# Altium PCB PCB1.PcbDoc
Units mm, origin at the board's own origin, x right, y up, seen from the top; angles counter-clockwise.
Board outline 60 x 22.5 mm, 2 copper layers (Top Layer, Bottom Layer); 17 components, 12 nets, 51 pads, 0 vias.
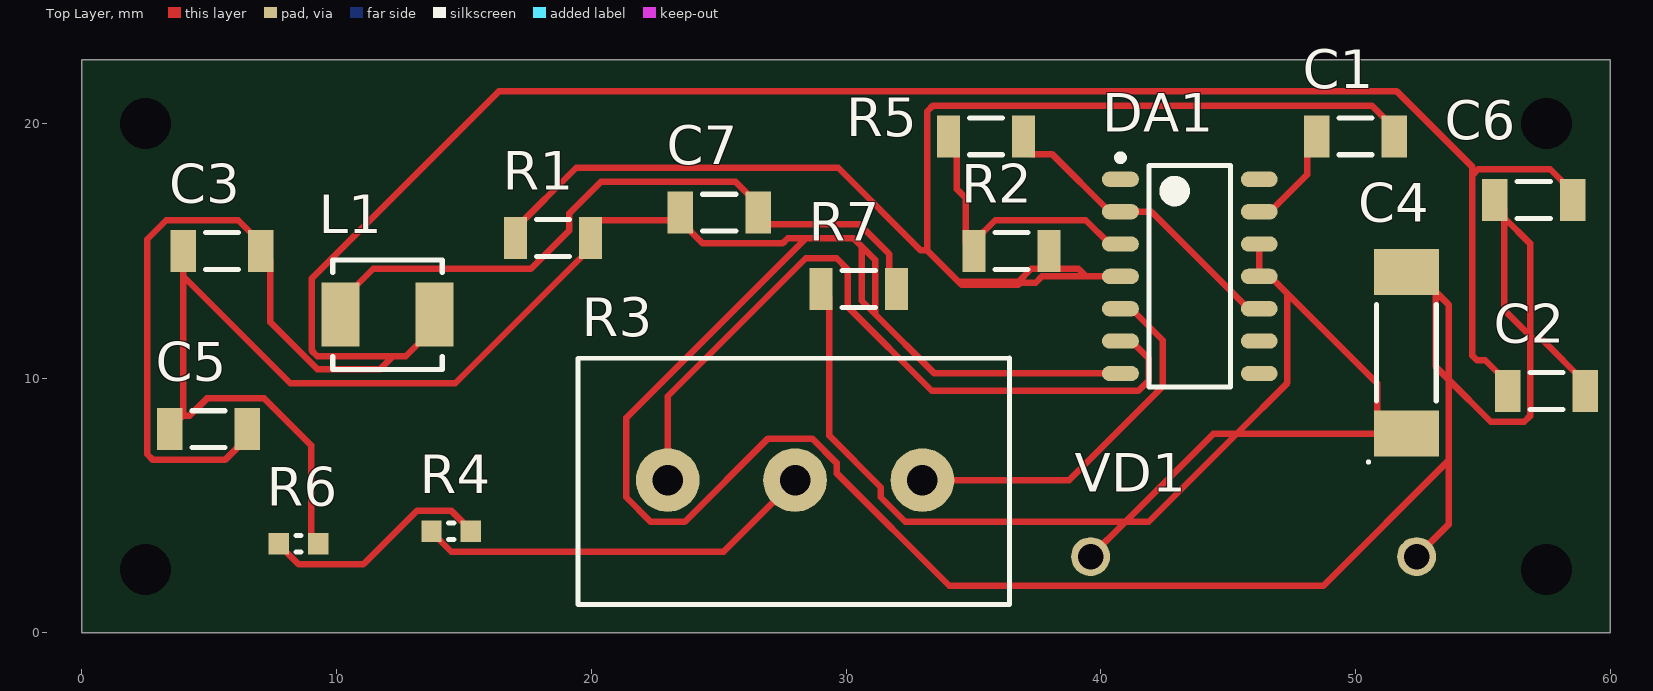
[diagram p0: Top Layer view]
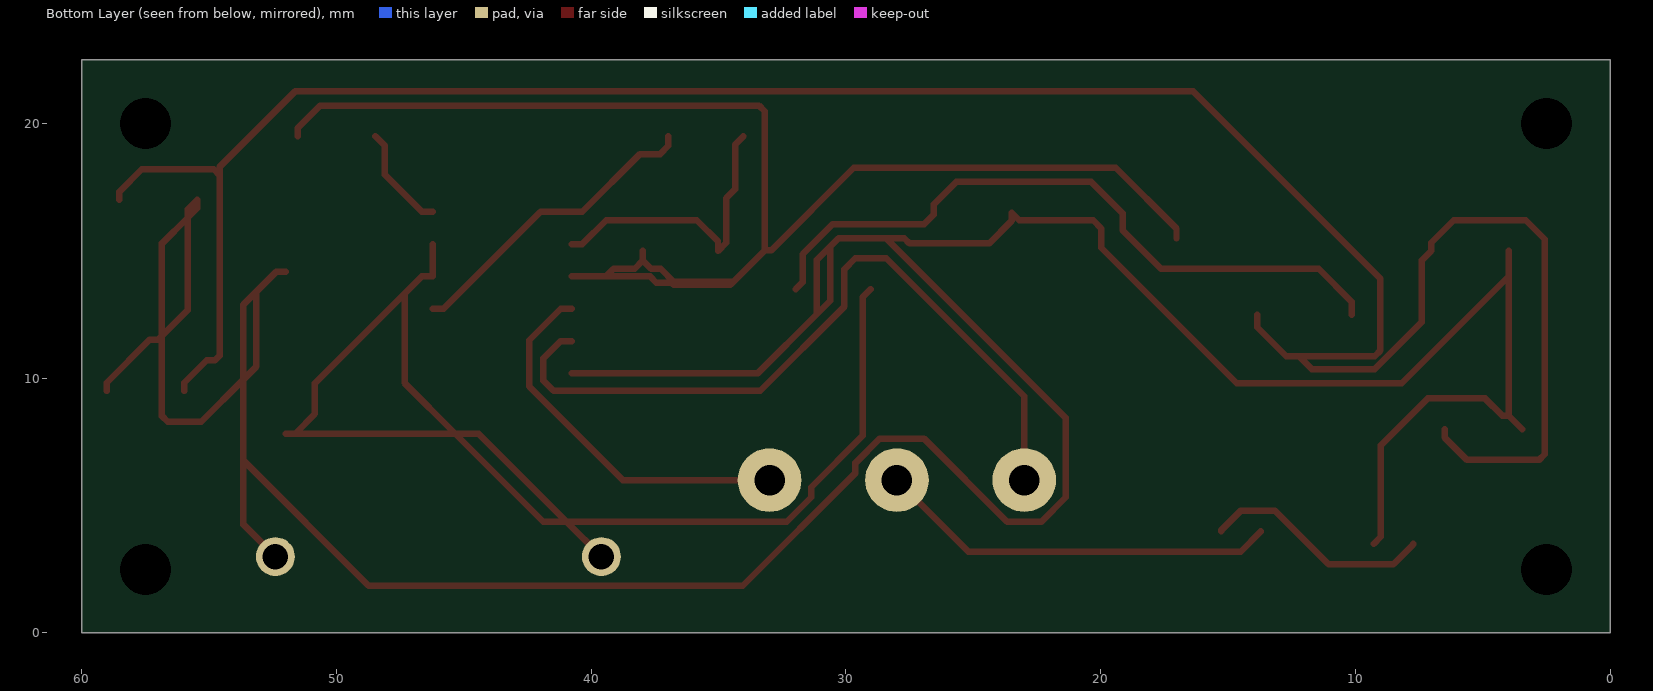
[diagram p1: Bottom Layer view, seen from below]
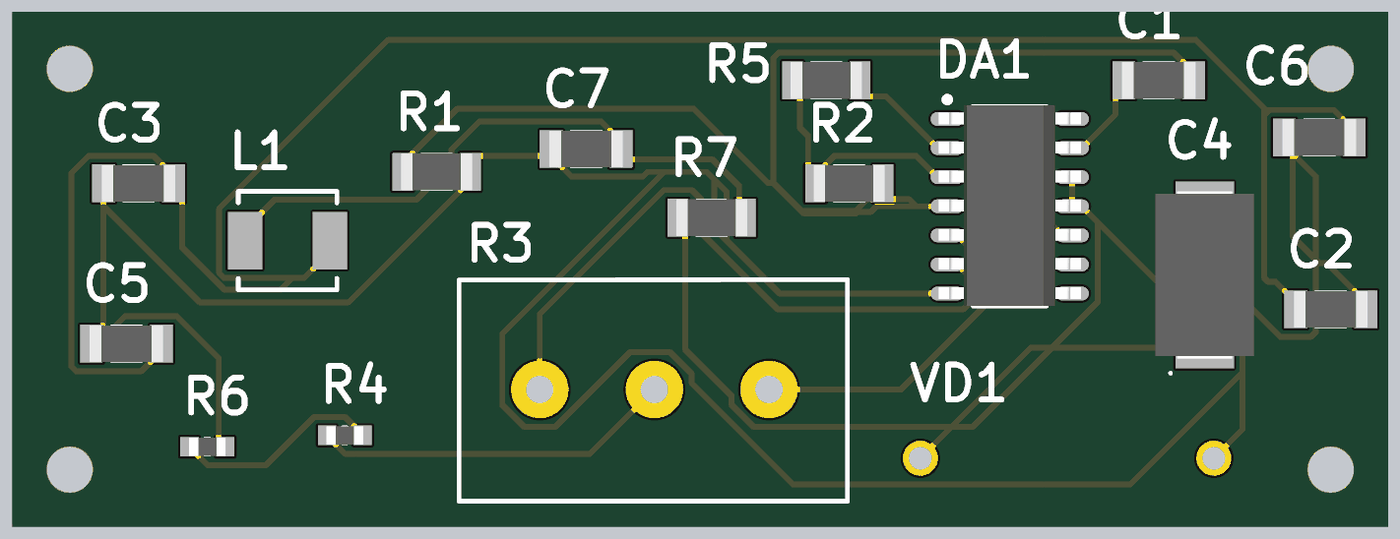
[diagram p2: 3D render of the assembled board from above, using the file's embedded part models]

## Layer stack, top to bottom
Top Solder: solder mask 0.0102, Solder Resist, Dk 3.5
Top Layer: signal copper 0.0356
Dielectric 1: dielectric 0.32, FR-4, Dk 4.8
Bottom Layer: signal copper 0.0356
Bottom Solder: solder mask 0.0102, Solder Resist, Dk 3.5

## Board outline
0,0 60,0 60,22.5 0,22.5

## Design rules (kind name [scope] priority, off if disabled: settings)
Clearance [All] p1: gap=0.254 ignorepadtopadclearanceinfootprint=FALSE except(0: Arc-Hole Track-Hole SMDPad-Hole THPad-Hole Via-Hole Fill-Hole Poly-Hole Region-Hole Text-Hole; 0.3: Arc-Arc Arc-Track Track-Track)
PolygonConnect [All] p1: connectstyle=Relief reliefconductorwidth=0.254 reliefentries=4 polygonreliefangle="90 Angle" airgapwidth=0.254
RoutingVias [All] p1: holewidth=0.711 width=1.27 viastyle="Through Hole" minholewidth=0.711 minwidth=1.27 maxholewidth=0.711 maxwidth=1.27
SolderMaskExpansion [All] p1: expansion=0.102
Width [All] p1: maxlimit=1 minlimit=0.1 preferedwidth=0.254
30 further rules are at their usual default settings.

## Components (designator, comment, footprint, x,y, rotation, side; value= is the part's Value field where it differs from the comment)
C1 "0.01 мкФ-5%-1206" 1206_cond 50,19.5 r0 top
C2 "75 пкФ-5%-1206" 1206_cond 57.5,9.5 r0 top
C3 "0.01 мкФ-5%-1206" 1206_cond 5.5,15 r0 top
C4 "22 мкФ-10%- TAJD226K016R" TAJD 52,11 r90 top
C5 "0.1 мкФ-5%-1206" 1206_cond 4.975,8 r0 top
C6 "0.01 мкФ-5%-1206" 1206_cond 57,17 r0 top
C7 "0.47мкФ-5%-1206" 1206_cond 25.025,16.5 r0 top
DA1 "MC1723CP" SOIC-14 43.5,14 r0 top
L1 "10 мГн-10%-CSAB0420" Ind 12,12.5 r0 top
R1 "10 КОм-5%-1206" 1206 18.5,15.5 r0 top
R2 "82 КОм-5%-1206" 1206 36.5,15 r0 top
R3 "1 КОм-10%-16K1-10C10K" 16K1 28,6 r0 top
R4 "5 КОм-5%-NCP18XW153J03RB" Term 14.5,4 r0 top
R5 "10 КОм-5%-1206" 1206 35.5,19.5 r0 top
R6 "5 КОм-5%-NCP18XW153J03RB" Term 8.5,3.5 r0 top
R7 "470 Ом-5%-1206" 1206 30.5,13.5 r0 top
VD1 "1N5357B" Stab 46,3 r180 top (schematic designator D1)

## Footprints (in the part's own frame and the unit in brackets; to place one, negate y for a bottom-side part, rotate by r counter-clockwise, add the part's x,y. Pads: shape width x height; smd on the part's side, far side on the other; paste and mask are expansions set on the pad)
16K1 [mm]
  round 2.5 hole 1.2 mask+0.102: 1(-5,0) 2(0,0) 3(5,0)
  silkscreen extent -8.52,-4.87 8.42,4.8, body extent -8.52,-19.4 8.47,4.9, height 22.5
1206 [mm] "Chip Resistor, 2-Leads, Body 3,10x1,60mm, IPC Medium Density"
  rect 0.9x1.65 smd: 0(-1.475,0) 1(1.475,0)
  silkscreen extent -0.65,-0.72 0.65,0.72, body extent -1.55,-0.8 1.55,0.8, height 0.54
1206_cond [mm]
  rect 1x1.65 smd: 0(-1.525,0) 1(1.525,0)
  silkscreen extent -0.65,-0.72 0.65,0.72, body extent -1.6,-0.8 1.6,0.8, height 1.49
Ind [mm] "Molded Inductor, 2-Leads, Body 4,20x4,20mm, IPC Medium Density"
  rect 1.5x2.5 smd: 0(-1.85,0) 1(1.85,0)
  silkscreen extent -2.15,-2.15 2.15,2.15, body extent -2.2,-2.04 2.2,2.16, height 1.74
SOIC-14 [mm] "SOIC, 14-Leads, Body 8,60x3,90mm, Pitch 1,27mm, IPC Medium Density"
  oval 1.45x0.6 smd: 1(-2.725,3.81) 2(-2.725,2.54) 3(-2.725,1.27) 4(-2.725,0) 5(-2.725,-1.27) 6(-2.725,-2.54) 7(-2.725,-3.81) 8(2.725,-3.81) 9(2.725,-2.54) 10(2.725,-1.27) 11(2.725,0) 12(2.725,1.27) 13(2.725,2.54) 14(2.725,3.81)
  silkscreen extent -2.85,-4.35 1.6,4.78, body extent -3.1,-4.35 3.1,4.4, height 1.74
Stab [mm]
  round 1.524 hole 1: 0(-6.4,0) 1(6.4,0)
  body extent -6.9,-1.8 6.9,1.8, height 6.3
TAJD [mm] "Chip Capacitor, 2-Leads, Body 7,30x2,40mm, IPC Medium Density"
  rect 1.8x2.55 smd: 0(-3.175,0) 1(3.175,0)
  silkscreen extent -4.34,-1.17 1.9,1.54, body extent -3.65,-2.15 3.65,2.15, height 2.89
Term [mm] "Chip Resistor, 2-Leads, Body 1,60x0,80mm, IPC Medium Density"
  rect 0.8x0.85 smd: 0(-0.775,0) 1(0.775,0)
  silkscreen extent -0.1,-0.33 0.1,0.33, body extent -0.8,-0.4 0.8,0.4, height 0.78

## Part data
C1 C2 C3 C5 C6 C7: library part Cap_1206C
C4: library part Cap_pol
L1: library part Inductor_0603L
R1 R2 R5 R7: library part "Resistor 1206R"
R3: library part Resistor_per
R4 R6: library part Term
VD1: library part Stab

## Free pads (board coordinates)
  round 1.524 hole 2: 2(2.5,20) 3(2.5,2.5) 4(57.5,2.5) 5(57.5,20)

## Nets (pads, with @x,y where several pads share a name; then routed paths per layer and width w, separated by ;. In a path a pad name is that pad's centre, name@x,y a point inside that pad or via, vN(x,y) a via of type N, cw(c..) or ccw(c..) an arc to the next point about the centre after c; other vN are vias at no path point)
GND: C2.1 C3.0 C4.1 C5.0 C6.0 C7.0 DA1.7 R1.1 R6.1 VD1.0 | length 156.4
  Top Layer w0.254: C5.0 3.45,8.003 3.823,8.376 3.826,8.376 3.975,8.525 ; C3.0 3.975,14.008 ; R6.1 9.002,3.773 9.002,7.362 7.158,9.206 4.91,9.206 4.229,8.525 3.975,8.525 ; DA1.7 33.471,10.19 31.144,12.517 ; C4.1 52.375,14.175 C4.1@53.148,13.402 ; VD1.0 53.656,4.256 53.656,6.767 ; C2.1 59.025,9.825 57.33,11.52 57.005,11.52 56.856,11.669 ; 3.975,8.525 3.975,14.008 ; 3.975,14.008 8.176,9.807 14.657,9.807 19.975,15.125 R1.1 19.975,15.875 20.298,16.198 23.198,16.198 C7.0 23.5,16.175 24.381,15.294 27.503,15.294 27.71,15.5 28.428,15.5 ; 28.428,15.5 30.29,15.5 30.615,15.176 ; 28.428,15.5 21.369,8.441 21.369,5.324 22.324,4.369 23.676,4.369 26.938,7.631 28.676,7.631 29.631,6.676 29.631,6.279 34.053,1.857 48.746,1.857 53.656,6.767 ; 30.615,15.176 31.144,14.647 31.144,12.517 ; 30.615,15.176 30.615,13.046 31.144,12.517 ; C4.1@53.148,13.402 53.656,12.894 53.656,9.955 ; C4.1@53.148,13.402 53.148,10.463 53.656,9.955 ; 53.656,6.767 53.656,9.955 ; 53.656,9.955 55.317,8.294 56.633,8.294 56.856,8.517 56.856,11.669 ; C6.0@55.848,16.302 56.856,15.294 56.856,11.669 ; C6.0@55.848,16.302 55.475,16.675 C6.0 55.848,16.627 C6.0@55.848,16.302 ; C6.0@55.848,16.302 55.848,12.677 56.856,11.669
NetC1_0: C1.0 DA1.13 | length 4.1
  Top Layer w0.254: DA1.13 46.65,16.54 48.102,17.992 48.102,19.127 C1.0
NetC1_1: C1.1 DA1.4 R1.0 R2.1 | length 59.4
  Top Layer w0.254: R1.0 17.025,15.875 19.41,18.26 29.697,18.26 32.94,15.017 33.194,15.017 ; R2.1 R2.1@37.975,14.625 ; DA1.4 39.428,14 ; C1.1 51.525,19.825 50.644,20.706 33.417,20.706 33.194,20.483 33.194,15.017 ; 33.194,15.017 34.417,13.794 36.769,13.794 37.277,14.302 37.652,14.302 R2.1@37.975,14.625 ; 33.194,15.017 34.536,13.675 36.769,13.675 36.848,13.754 37.448,13.754 37.693,14 39.428,14 ; R2.1@37.975,14.625 38.298,14.302 39.126,14.302 39.428,14
NetC2_0: C2.0 C3.1 C5.1 C6.1 L1.1 | length 100.2
  Top Layer w0.254: C5.1 6.5,7.675 5.619,6.794 2.792,6.794 2.569,7.017 2.569,15.458 3.317,16.206 6.144,16.206 7.025,15.325 C3.1 7.398,14.627 7.398,12.205 9.242,10.361 11.711,10.361 12.219,10.869 ; L1.1 13.85,12 12.719,10.869 12.219,10.869 ; C2.0 55.975,9.825 55.099,10.701 54.774,10.701 54.594,10.881 54.594,17.983 ; C6.1 58.525,17.325 57.644,18.206 54.817,18.206 54.594,17.983 ; 12.219,10.869 9.242,10.869 9.019,11.092 9.019,13.908 16.371,21.26 51.629,21.26 54.594,18.295 54.594,17.983
NetC4_0: C4.0 DA1.11 DA1.12 R7.0 VD1.1 | length 55.6
  Top Layer w0.254: R7.0 29.348,13.177 29.348,7.742 31.369,5.721 31.369,5.324 32.324,4.369 40.969,4.369 ; VD1.1 40.969,4.369 ; DA1.12 DA1.11 46.65,14 47.331,13.319 ; C4.0 C4.0@51.625,7.825 ; 40.969,4.369 44.425,7.825 45.339,7.825 ; 40.969,4.369 41.883,4.369 45.339,7.825 ; 45.339,7.825 C4.0@51.625,7.825 ; 45.339,7.825 47.331,9.817 47.331,13.319 ; 47.331,13.319 50.852,9.798 50.852,8.598 C4.0@51.625,7.825
NetC7_1: C7.1 L1.0 R7.1 | length 27.3
  Top Layer w0.254: L1.0 10.15,13 11.444,14.294 17.633,14.294 19.144,15.805 19.144,16.483 20.367,17.706 25.669,17.706 26.55,16.825 C7.1 26.55,16.427 26.923,16.054 30.52,16.054 31.698,14.876 31.698,13.777 R7.1
NetDA1_2: DA1.2 DA1.10 R5.1 | length 12.3
  Top Layer w0.254: R5.1 36.975,19.125 37.298,18.802 38.088,18.802 40.35,16.54 DA1.2 41.99,16.54 45.8,12.73 DA1.10
NetDA1_3: DA1.3 R2.0 R5.0 | length 11.8
  Top Layer w0.254: R5.0 34.348,19.177 34.348,17.427 34.702,17.073 34.702,15.323 R2.0 35.025,15.375 35.856,16.206 39.414,16.206 40.35,15.27 DA1.3
NetDA1_5: DA1.5 R3.3 | length 14.9
  Top Layer w0.254: R3.3 38.757,6 42.435,9.678 42.435,11.495 41.2,12.73 DA1.5
NetDA1_6: DA1.6 R3.1 | length 29.8
  Top Layer w0.254: R3.1 23,9.289 28.417,14.706 29.633,14.706 30.061,14.278 30.061,12.817 33.369,9.509 41.482,9.509 41.881,9.908 41.881,10.779 41.2,11.46 DA1.6
NetR3_2: R3.2 R4.0 | length 15.8
  Top Layer w0.254: R4.0 13.725,3.975 14.506,3.194 25.194,3.194 R3.2
NetR4_1: R4.1 R6.0 | length 9.1
  Top Layer w0.254: R6.0 7.725,3.475 8.506,2.694 11.055,2.694 13.167,4.806 14.494,4.806 15.275,4.025 R4.1
pads on no net: DA1.1 DA1.8 DA1.9 DA1.14

## Silkscreen, mask and mechanical layers (free items; w line width, h text height)
Mechanical 1:
  the board outline again, w0.254